# Altium PCB encoderBreakout1.PcbDoc
Units mm, origin at the board's own origin, x right, y up, seen from the top; angles counter-clockwise.
Board outline 25 x 25 mm, 2 copper layers (Top Layer, Bottom Layer); 21 components, 18 nets, 98 pads, 21 vias.
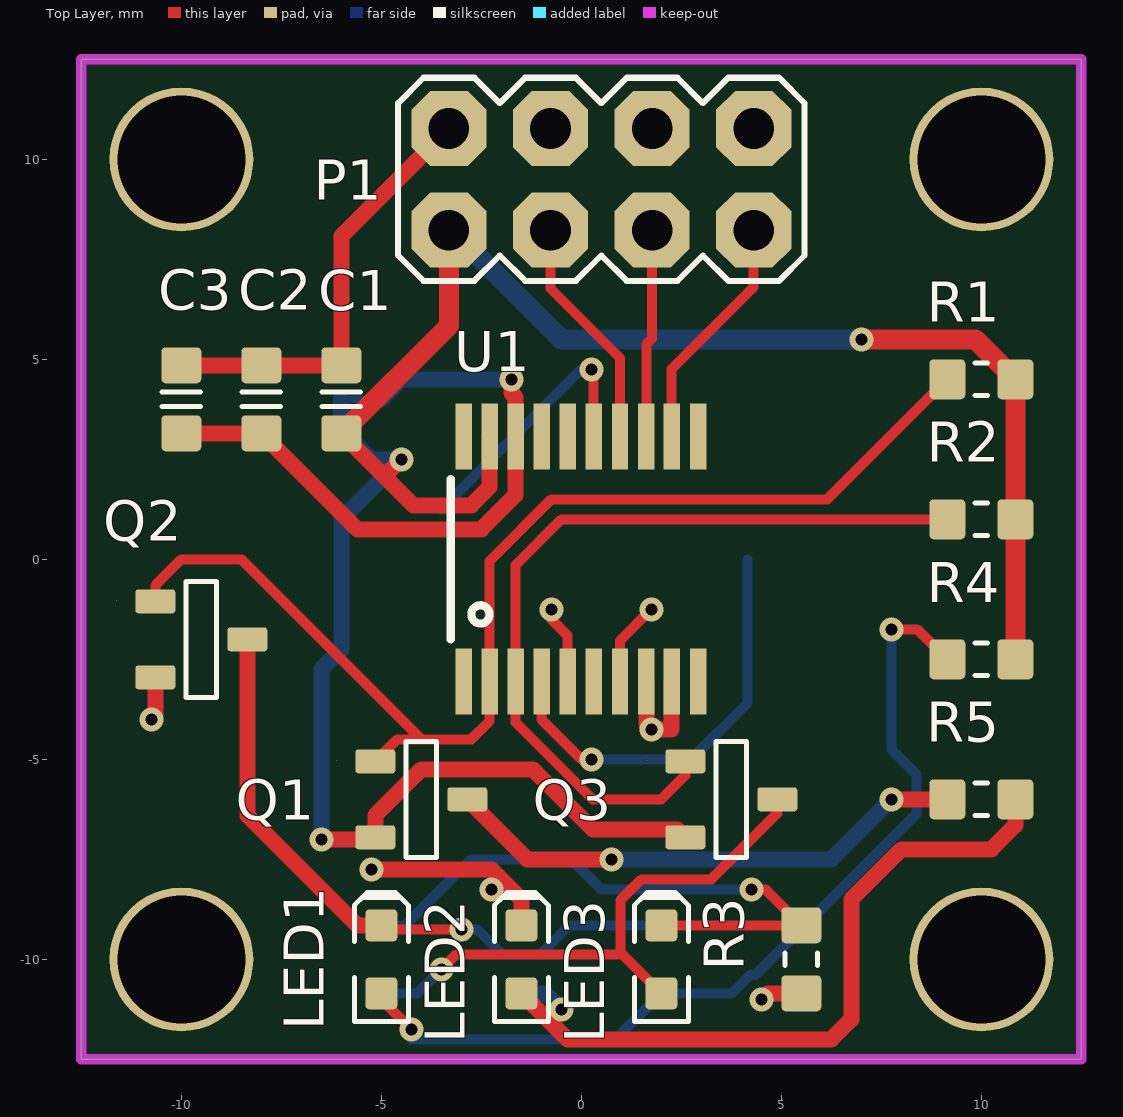
[diagram p0: Top Layer view]
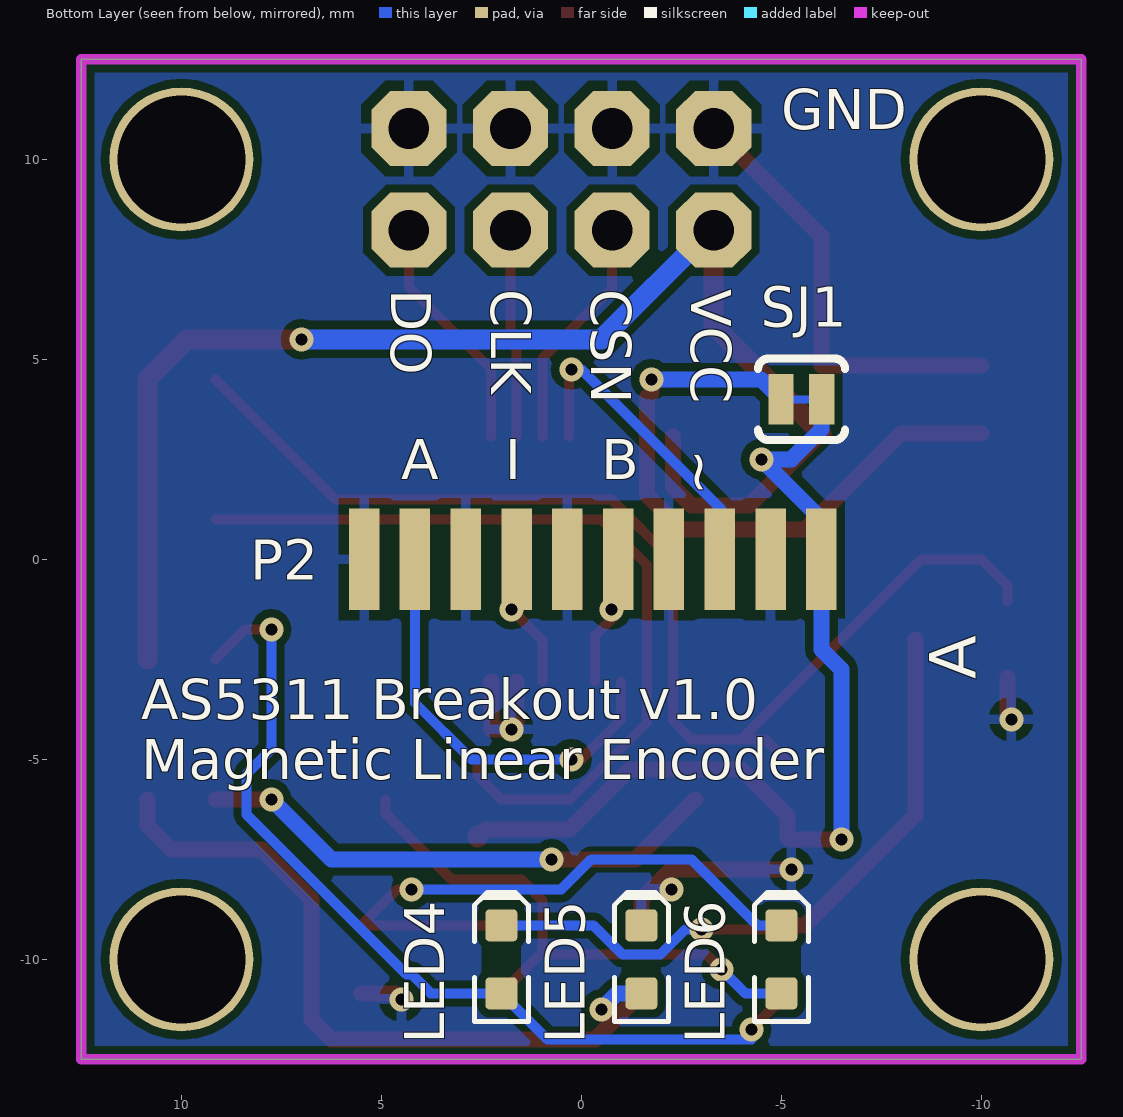
[diagram p1: Bottom Layer view, seen from below]
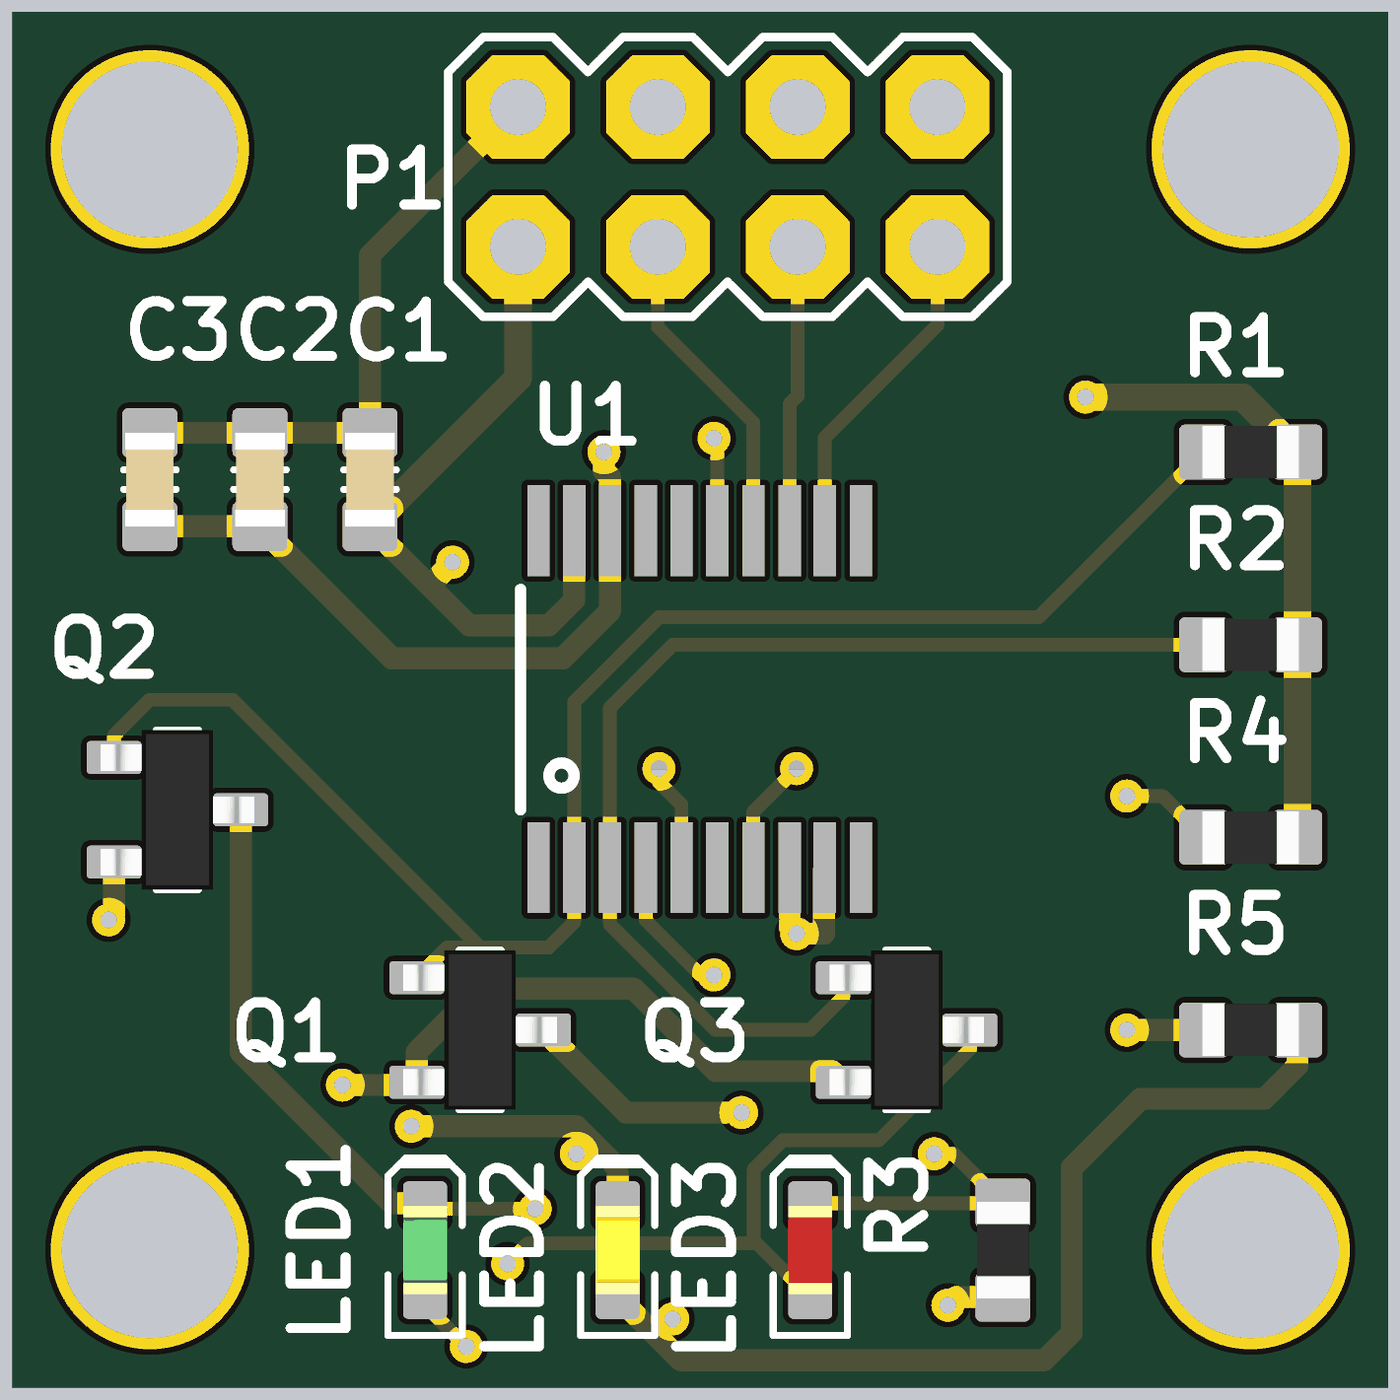
[diagram p2: 3D render of the assembled board from above, using the file's embedded part models]
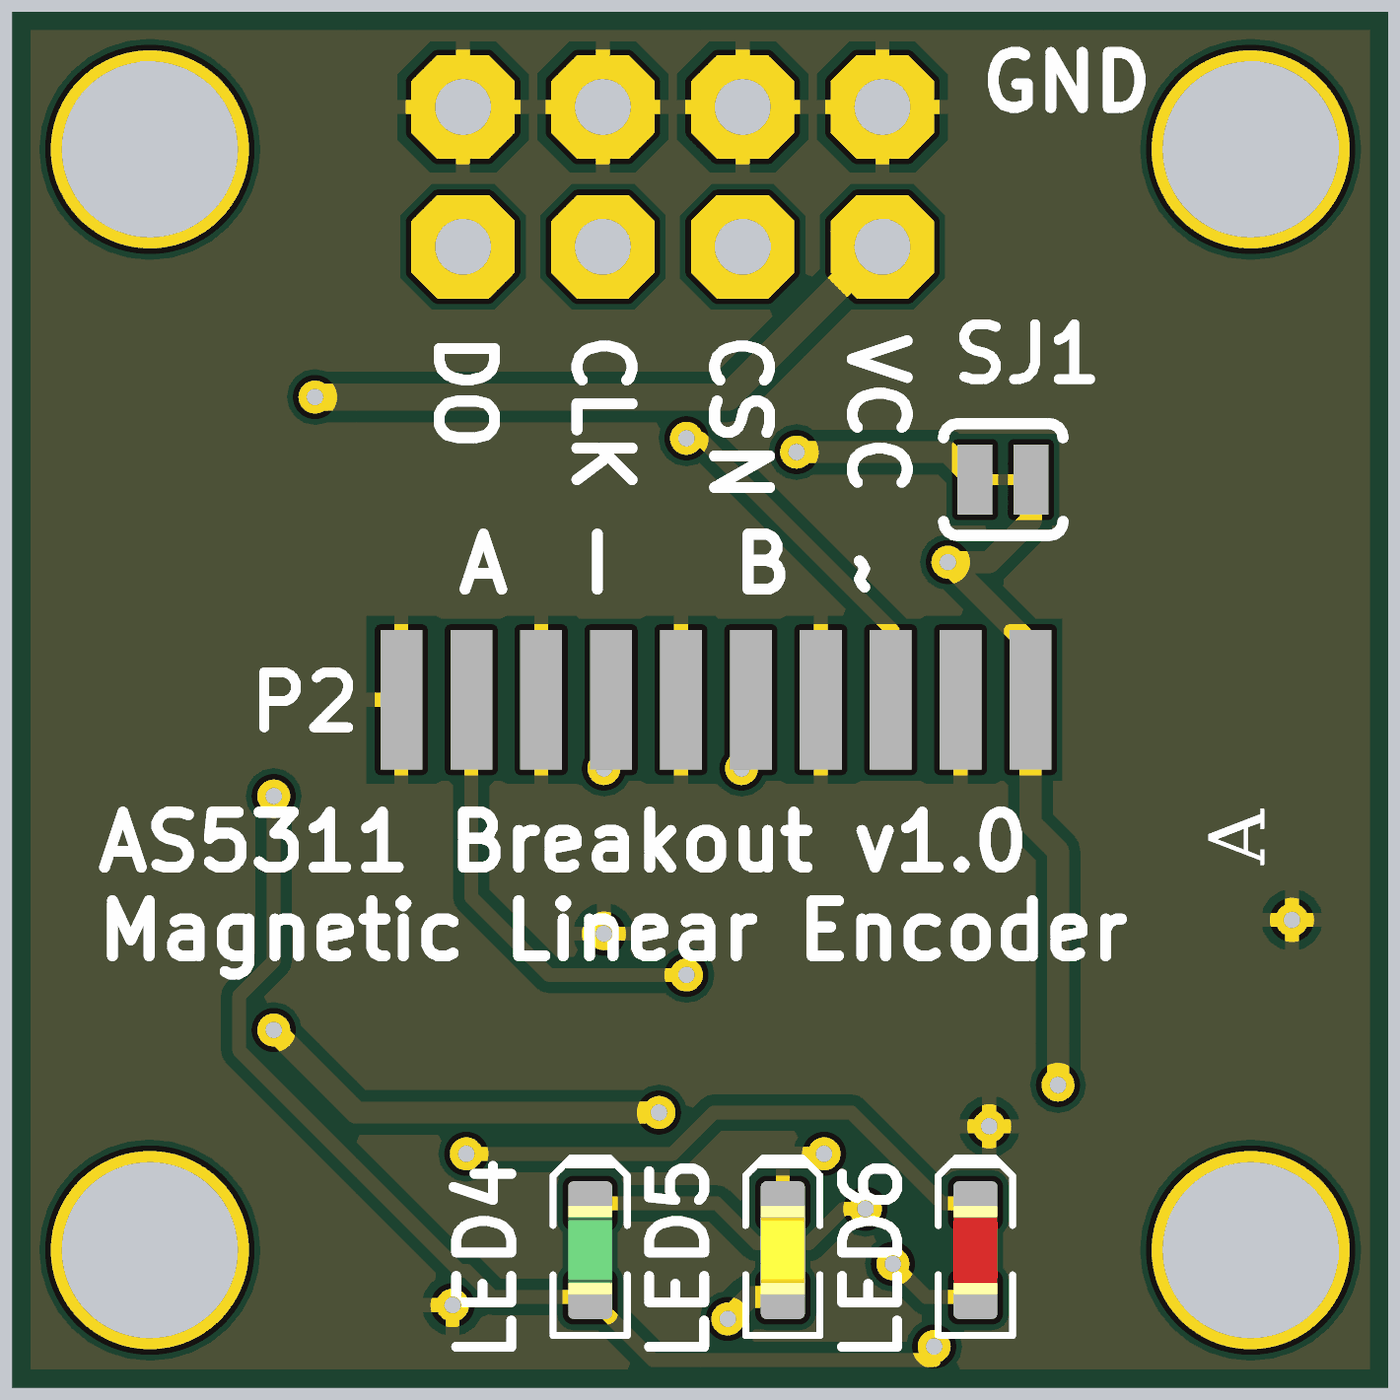
[diagram p3: 3D render of the assembled board from below, using the file's embedded part models]

## Layer stack, top to bottom
Top Solder: solder mask 0.0102, Solder Resist, Dk 3.5
Top Layer: signal copper 0.0356
Dielectric1: dielectric 0.32, FR-4, Dk 4.8
Bottom Layer: signal copper 0.0356
Bottom Solder: solder mask 0.0102, Solder Resist, Dk 3.5

## Board outline
-12.5,-12.5 -12.5,12.5 12.5,12.5 12.5,-12.5

## Design rules (kind name [scope] priority, off if disabled: settings)
Clearance [All] p1: gap=0.2
FabricationTestPointUsage TestPointUsage [All] p1: valid=0 allowmultiple=FALSE
FabricationTestpoint Testpoint [All] p1: side=3 testpointundercomponent=TRUE minsize=1.016 maxsize=2.54 preferedsize=1.524 minholesize=0 maxholesize=1.016 preferedholesize=0.813 testpointgrid=0.025 allowsidetop=TRUE allowsidebottom=TRUE usegrid=TRUE gridtolerance=0
HoleSize [All] p1: absolutevalues=TRUE maxlimit=3.5 minlimit=0.025 maxpercent=80.000 minpercent=20.000
PolygonConnect [All] p1: connectstyle=Relief reliefconductorwidth=0.254 reliefentries=4 polygonreliefangle="90 Angle" airgapwidth=0.254
RoutingVias [All] p1: holewidth=0.711 width=1.27 viastyle="Through Hole" minholewidth=0.711 minwidth=1.27 maxholewidth=0.711 maxwidth=1.27
SilkToSolderMaskClearance SilkscreenOverComponentPads [IsPad] p1: minsilkscreentomaskgap=0.254 clearancetoexposedcopper=TRUE
SolderMaskExpansion [All] p1: expansion=0.102
Width [All] p1: maxlimit=1 minlimit=0.2 preferedwidth=0.25
26 further rules are at their usual default settings.

## Components (designator, comment, footprint, x,y, rotation, side; value= is the part's Value field where it differs from the comment)
C1 "approved sub OK" CAPC1608X90N -6,4 r270 top
C2 "approved sub OK" CAPC1608X90N -8,4 r270 top
C3 "approved sub OK" CAPC1608X90N -10,4 r270 top
LED1 "Green" LED-0603-GREEN -5,-10 r90 top
LED2 "Yellow" LED-0603-YELLOW -1.5,-10 r90 top
LED3 "Red" LED-0603-RED 2,-10 r90 top
LED4 "Green" LED-0603-GREEN 2,-10 r90 bottom
LED5 "Yellow" LED-0603-YELLOW -1.5,-10 r90 bottom
LED6 "Red" LED-0603-RED -5,-10 r90 bottom
P1 ".1\" header, two rows of four." 2X4 0.5,9.5 r180 top
P2 "CON10" SMT_CON_PADS -6,0 r90 bottom
Q1 "BSS84" SOT23-3 -4,-6 r0 top
Q2 "BSS123" SOT23-3 -9.5,-2 r0 top
Q3 "BSS84" SOT23-3 3.75,-6 r0 top
R1 "Thick Film" RESC1608X55N 10,4.5 r180 top
R2 "Thick Film" RESC1608X55N 10,1 r180 top
R3 "Thick Film" RESC1608X55N 5.5,-10 r270 top
R4 "Thick Film" RESC1608X55N 10,-2.5 r180 top
R5 "Thick Film" RESC1608X55N 10,-6 r0 top
SJ1 "JUMPER-PAD-2-NC_BY_TRACE" PAD-JUMPER-2-NC_BY_TRACE_YES_SILK -5.5,4 r180 bottom
U1 "AS5311" TSSOP-20 0,0 r0 top

## Footprints (in the part's own frame and the unit in brackets; to place one, negate y for a bottom-side part, rotate by r counter-clockwise, add the part's x,y. Pads: shape width x height; smd on the part's side, far side on the other; paste and mask are expansions set on the pad)
2X4 [mil]
  oct 74x74 hole 40: 1(-150,-50) 2(-150,50) 3(-50,-50) 4(-50,50) 5(50,-50) 6(50,50) 7(150,-50) 8(150,50)
  silkscreen extent -200,-100 200,100
CAPC1608X90N [mm] "Chip Capacitor, Body 1.6x0.8mm, EIA 0603, IPC Medium Density"
  round 0.254 on Mech15: 0(0,0)
  rrect25% 0.9x1 smd: 1(-0.85,0) 2(0.85,0)
  Top Layer pour cut-out: -0.6,0.5 -0.4,0.7 0.4,0.7 0.6,0.5 0.6,-0.5 0.4,-0.7 -0.4,-0.7 -0.6,-0.5
  silkscreen extent -0.18,-0.48 0.18,0.48, body extent -0.85,-0.45 0.85,0.45, height 0.89
LED-0603-GREEN [mm]
  round 0.254 on Mech15: 0(0,0)
  rrect25% 0.8x0.8 smd: A(-0.85,0) K(0.85,0)
  Top Layer pour cut-out: -0.5,0.5 0.5,0.5 0.5,-0.5 -0.5,-0.5
  silkscreen extent -1.55,-0.67 1.68,0.67, body extent -0.8,-0.4 0.8,0.4, height 0.75
LED-0603-RED [mm]
  round 0.254 on Mech15: 0(0,0)
  rrect25% 0.8x0.8 smd: A(-0.85,0) K(0.85,0)
  Top Layer pour cut-out: -0.5,0.5 0.5,0.5 0.5,-0.5 -0.5,-0.5
  silkscreen extent -1.55,-0.67 1.68,0.67, body extent -0.8,-0.4 0.8,0.4, height 0.75
LED-0603-YELLOW [mm]
  round 0.254 on Mech15: 0(0,0)
  rrect25% 0.8x0.8 smd: A(-0.85,0) K(0.85,0)
  Top Layer pour cut-out: -0.5,0.5 0.5,0.5 0.5,-0.5 -0.5,-0.5
  silkscreen extent -1.55,-0.67 1.68,0.67, body extent -0.8,-0.4 0.8,0.4, height 0.75
PAD-JUMPER-2-NC_BY_TRACE_YES_SILK [mil]
  rect 25x50 smd: 1(-20,0) 2(20,0)
  Top Layer lines w8: 15,0 -15,0
  silkscreen extent -43,-40 43,40
RESC1608X55N [mm] "Chip Resistor, Body 1.6x0.8mm, EIA 0603, IPC Medium Density"
  round 0.254 on Mech15: 0(0,0)
  rrect25% 0.9x1 smd: 1(-0.85,0) 2(0.85,0)
  Top Layer pour cut-out: -0.6,0.5 -0.4,0.7 0.4,0.7 0.6,0.5 0.6,-0.5 0.4,-0.7 -0.4,-0.7 -0.6,-0.5
  silkscreen extent -0.15,-0.41 0.15,0.41, body extent -0.87,-0.47 0.88,0.48, height 0.54
SMT_CON_PADS [mil]
  rect 100x30 smd: P$1(0,0) P$2(0,50) P$3(0,100) P$4(0,150) P$5(0,200) P$6(0,250) P$7(0,300) P$8(0,350) P$9(0,400) P$10(0,450)
SOT23-3 [mm] "SOT23, 3 pin"
  round 0.5 on Mech15: 0(0,0)
  rrect25% 1x0.6 smd: 1(-1.15,0.95) 2(-1.15,-0.95) 3(1.15,0)
  silkscreen extent -0.38,-1.45 0.38,1.45, body extent -1.4,-1.45 1.4,1.45, height 1.29
TSSOP-20 [mil]
  rect 16x65 smd: 1(-115.75,-120.08) 2(-90.16,-120.08) 3(-64.57,-120.08) 4(-38.98,-120.08) 5(-13.39,-120.08) 6(12.2,-120.08) 7(38,-120.08) 8(64,-120.08) 9(89,-120.08) 10(115,-120.08) 11(115,121) 12(89,121) 13(64,121) 14(38,121) 15(12.2,121) 16(-13.39,121) 17(-38.98,121) 18(-64.57,121) 19(-90.16,121) 20(-115.75,121)
  silkscreen extent -129,-79 -90,79

## Part data
C1 C2: library part CAPC_100n_0603_X7R_50V_10%, "Capacitor SMD Cer 100nF 10% 50V X7R 0603"
C3: library part CAPC_1u_0603_X7R_16V_10%, "Capacitor SMD Cer 1uF 10% 16V X7R 0603"
LED1 LED4: library part LED_SMD_Green_0603_570nm, "LED 0603 SMD Green 570nm 50mcd 20mA"
LED2 LED5: library part LED_SMD_Yellow_0603_150mcd, "LED 0603 SMD Yellow 590nm 150mcd 20mA"
LED3 LED6: library part LED_SMD_Red_0603_220mcd, "LED 0603 SMD Hyper Red 630nm 220mcd 20mA"
P1: library part M04X2
Q1 Q3: library part MOSFET_BSS84, "MOSFET SMD P-CH 50V 130mA SOT23-3"
Q2: library part MOSFET_BSS123, "MOSFET SMD N-CH 100V 170mA SOT23-3"
R1 R2: library part RES_4K7_0603_5%, "Resistor SMD chip 4.7k Ohm 0.1W 5% 0603"
R3 R4 R5: library part RES_330R_0603_5%, "Resistor SMD chip 330 Ohm 0.1W 5% 0603"
U1: "AMS's AS5311 linear hall-effect encoder."

## Free pads (board coordinates)
  round 3.6 hole 3.2: 0(-10,-10) 0(-10,10) 0(10,-10) 0(10,10)

## Via types
v1: diameter 0.6, hole 0.3, Top Layer to Bottom Layer, 21 vias

## Nets (pads, with @x,y where several pads share a name; then routed paths per layer and width w, separated by ;. In a path a pad name is that pad's centre, name@x,y a point inside that pad or via, vN(x,y) a via of type N, cw(c..) or ccw(c..) an arc to the next point about the centre after c; other vN are vias at no path point)
A: P2.P$9 U1.4 | length 10.7
  Top Layer w0.25: U1.4 -0.99,-4.01 0,-5 v1(0.25,-5)
  Bottom Layer w0.25: v1(0.25,-5) 2.75,-5 4.16,-3.59 P2.P$9
B: P2.P$5 U1.5 | length 2
  Top Layer w0.25: v1(-0.75,-1.25) -0.75,-1.5 -0.34,-1.91 U1.5
CLK: P1.4 U1.13 | length 5.2
  Top Layer w0.25: U1.13 1.626,5.376 1.77,5.52 P1.4
CSN: P1.6 U1.14 | length 5.9
  Top Layer w0.25: P1.6 -0.77,6.77 0.965,5.035 U1.14
DO: P1.2 U1.12 | length 6
  Top Layer w0.25: U1.12 2.261,4.761 4.31,6.81 P1.2
GND: C1.1 C2.1 C3.1 LED2.K LED5.K P1.1 P1.3 P1.5 P1.7 P2.P$2 P2.P$4 P2.P$6 P2.P$8 P2.P$10 Q2.2 R3.2 U1.8 U1.9 | length 20.9
  Top Layer w0.4: v1(-10.75,-4) -10.65,-3.9 Q2.2 ; C3.1 C2.1 C1.1 -6,8.08 P1.7 ; v1(-5.25,-7.75) -2.25,-7.75 -1.5,-8.5 LED2.K ; U1.8 1.626,-4.124 v1(1.751,-4.25) 2.25,-4.25 2.25,-3.061 U1.9 ; v1(4.5,-11) 4.65,-10.85 R3.2
  other v1: -2.25,-8.25
INDEX: P2.P$7 U1.7 | length 2.1
  Top Layer w0.25: U1.7 0.965,-2.035 v1(1.75,-1.25)
NetLED1_A: LED1.A LED4.A R4.2 | length 23
  Top Layer w0.25: LED1.A -5,-11 v1(-4.25,-11.75) ; v1(7.75,-1.75) 8.4,-1.75 R4.2
  Bottom Layer w0.25: v1(-4.25,-11.75) -4.25,-12 0.85,-12 LED4.A 3.766,-10.85 4.241,-10.375 4.375,-10.375 8.375,-6.375 8.375,-5.375 7.75,-4.75 v1(7.75,-1.75)
NetLED1_K: LED1.K LED4.K Q2.3 | length 16.5
  Top Layer w0.25: LED1.K -4.9,-9.25 v1(-3,-9.25)
  Top Layer w0.4: Q2.3 -8.35,-6.4 -5.6,-9.15 LED1.K
  Bottom Layer w0.25: v1(-3,-9.25) -2.601,-9.25 -1.976,-9.875 -1.024,-9.875 -0.299,-9.15 LED4.K
NetLED2_A: LED2.A LED5.A R5.2 | length 18.6
  Top Layer w0.4: LED2.A -0.35,-12 6.25,-12 6.75,-11.5 6.75,-8.5 8,-7.25 10.25,-7.25 10.85,-6.65 R5.2
  Bottom Layer w0.4: LED5.A -0.9,-10.85 v1(-0.5,-11.25)
NetLED3_A: LED3.A LED6.A Q3.3 | length 14.3
  Top Layer w0.25: v1(-3.5,-10.25) -3.125,-9.875 0.975,-9.875 0.975,-8.525 1.5,-8 3.25,-8 4.9,-6.35 Q3.3 ; 1,-9.85 LED3.A
  Bottom Layer w0.25: LED6.A -4.1,-10.85 v1(-3.5,-10.25)
NetLED3_K: LED3.K LED6.K R3.1 | length 15.4
  Top Layer w0.25: LED3.K R3.1 4.6,-8.25 v1(4.25,-8.25)
  Bottom Layer w0.25: LED6.K -4.4,-9.15 -2.75,-7.5 -0.25,-7.5 0.5,-8.25 v1(4.25,-8.25)
NetQ1_1: Q1.1 Q2.1 R1.2 U1.2 | length 29.8
  Top Layer w0.25: Q2.1 -10.65,-0.65 -10,0 -8.5,0 -4,-4.5 ; Q1.1 -4.6,-4.5 -4,-4.5 ; R1.2 6.15,1.5 -0.75,1.5 -2.29,-0.04 U1.2 -2.29,-4.04 -2.75,-4.5 -4,-4.5
NetQ1_3: Q1.3 R5.1 | length 13.2
  Top Layer w0.4: Q1.3 -1.35,-7.5 v1(0.75,-7.5) ; v1(7.75,-6) R5.1
  Bottom Layer w0.4: v1(0.75,-7.5) 6.25,-7.5 v1(7.75,-6)
NetQ3_1: Q3.1 R2.2 U1.3 | length 20.8
  Top Layer w0.25: Q3.1 2.6,-5.4 2,-6 0.281,-6 -1.64,-4.079 U1.3 -1.64,-0.14 -0.5,1 R2.2
PWM: P2.P$3 U1.15 | length 6.9
  Top Layer w0.25: v1(0.25,4.75) 0.31,4.69 U1.15
  Bottom Layer w0.25: P2.P$3@-3.5,1.25 0,4.75 v1(0.25,4.75)
VCC: C1.2 P1.8 P2.P$1 Q1.2 Q3.2 R1.1 R2.1 R4.1 SJ1.2 U1.19 | length 59.2
  Top Layer w0.4: v1(-6.5,-7) -5.2,-7 Q1.2 -5.15,-6.4 -4,-5.25 -1.211,-5.25 0.289,-6.75 2.4,-6.75 Q3.2 ; C1.2 -5,2.15 ; v1(-4.5,2.5) -4.85,2.15 -5,2.15 ; U1.19 -2.29,1.809 -2.749,1.35 -4.2,1.35 -5,2.15
  Top Layer w0.5: C1.2 -3.31,5.84 P1.8 ; Q3.2 Q3.2@2.6,-6.908 ; v1(7,5.5) 9.85,5.5 R1.1 R2.1 R4.1
  Bottom Layer w0.4: v1(-6.5,-7) -6.5,-2.75 -6,-2.25 P2.P$1 -6,1 v1(-4.5,2.5) -5.25,2.5 -6.008,3.258 SJ1.2
  Bottom Layer w0.5: P1.8 -3.23,8.23 -0.5,5.5 v1(7,5.5)
VDD3V3: C2.2 C3.2 SJ1.1 U1.18 | length 16.1
  Top Layer w0.4: C3.2 C2.2 -5.6,0.75 -2.5,0.75 -1.64,1.61 U1.18 -1.64,4.047 -1.75,4.157 v1(-1.75,4.5)
  Bottom Layer w0.4: SJ1.1 -4.492,4.5 v1(-1.75,4.5)
pads on no net: C1.0 C2.0 C3.0 LED1.0 LED2.0 LED3.0 LED4.0 LED5.0 LED6.0 Q1.0 Q2.0 Q3.0 R1.0 R2.0 R3.0 R4.0 R5.0 U1.1 U1.6 U1.10 U1.11 U1.16 U1.17 U1.20

## Polygon pours and split planes (outlines as drawn)
GND on Bottom Layer "Bottom Layer-GND" (solid, pour order 0): -12.5,-12.5 12.5,-12.5 12.5,12.5 -12.5,12.5

## Keep-outs
Keep-Out Layer:
  the board outline again, w0.254

## Silkscreen, mask and mechanical layers (free items; w line width, h text height)
Bottom Overlay:
  text "GND" at -5,10.75 h1
  text "VCC" at -2.75,6.75 h1 r90
  text "CSN" at -0.25,6.75 h1 r90
  text "CLK" at 2.25,6.75 h1 r90
  text "DO" at 4.75,6.75 h1 r90
  text "~" at -2.5,2.75 h1 r90
  text "B" at -0.5,2 h1
  text "I" at 1.5,2 h1
  text "A" at 4.5,2 h1
  text "A" at -10.25,-3 h2 r270
  text "AS5311 Breakout v1.0 / Magnetic Linear Encoder" at 11,-5.5 h1
Mechanical 16:
  drawing of 1878 lines, arcs and shapes, not listed
  text "1" at -97.285,82.369 h1.78
  text "2" at -24.641,82.369 h1.78
  text "3" at 48.511,82.369 h1.78
  text "4" at 121.409,82.369 h1.78
  text "A" at -131.626,59.357 h1.78
  text "A" at 155.394,59.357 h1.78
  text "B" at -131.626,11.3 h1.78
  text "B" at 155.394,11.3 h1.78
  text "C" at -131.626,-37.214 h1.78
  text "C" at 155.394,-37.214 h1.78
  text "ENGINEER:" at 40.459,-74.222 h1.14
  text "TITLE:" at 78.559,-74.222 h1.14
  text "PCB DESIGNER:" at 40.459,-81.715 h1.14
  text "D" at -131.626,-85.22 h1.78
  text "D" at 155.394,-85.22 h1.78
  text "DATE:" at 40.459,-89.462 h1.14
  text "PART NO.:" at 78.559,-89.462 h1.14
  text "REV:" at 131.899,-89.462 h1.14
  text "Altium Limited" at 7.439,-92.002 h1.78
  text ".PRINT_DATE" at 41.729,-92.51 h1.78
  text "12a Rodborough Rd" at 7.439,-94.542 h1.78
  text "Frenchs Forest" at 7.439,-97.082 h1.78
  text "FILE NAME:" at 40.459,-97.082 h1.14
  text "DWG NO:" at 78.559,-97.082 h1.14
  text "SCALE:" at 131.899,-97.082 h1.14
  text "NSW 2086" at 7.439,-99.622 h1.78
  text ".PCB_FILE_NAME_NO_PATH" at 41.729,-100.13 h1.78
  text "1" at -97.285,-105.591 h1.78
  text "2" at -24.641,-105.591 h1.78
  text "3" at 48.511,-105.591 h1.78
  text "4" at 121.409,-105.591 h1.78